# EAGLE board RasPiDV (EAGLE 6.4)
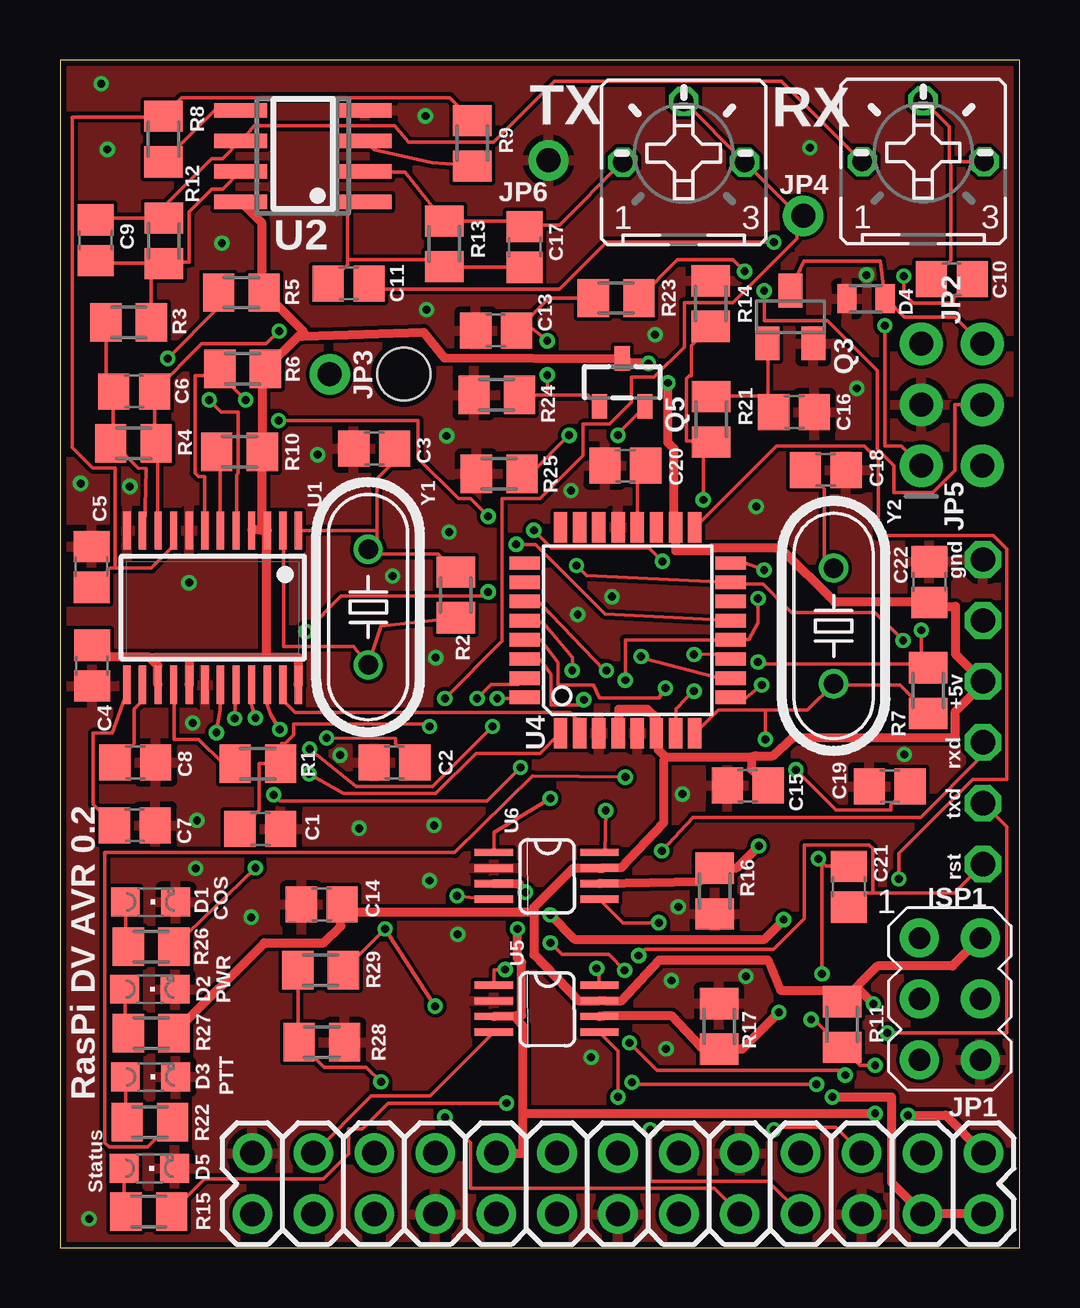
[diagram p0: board, top side]
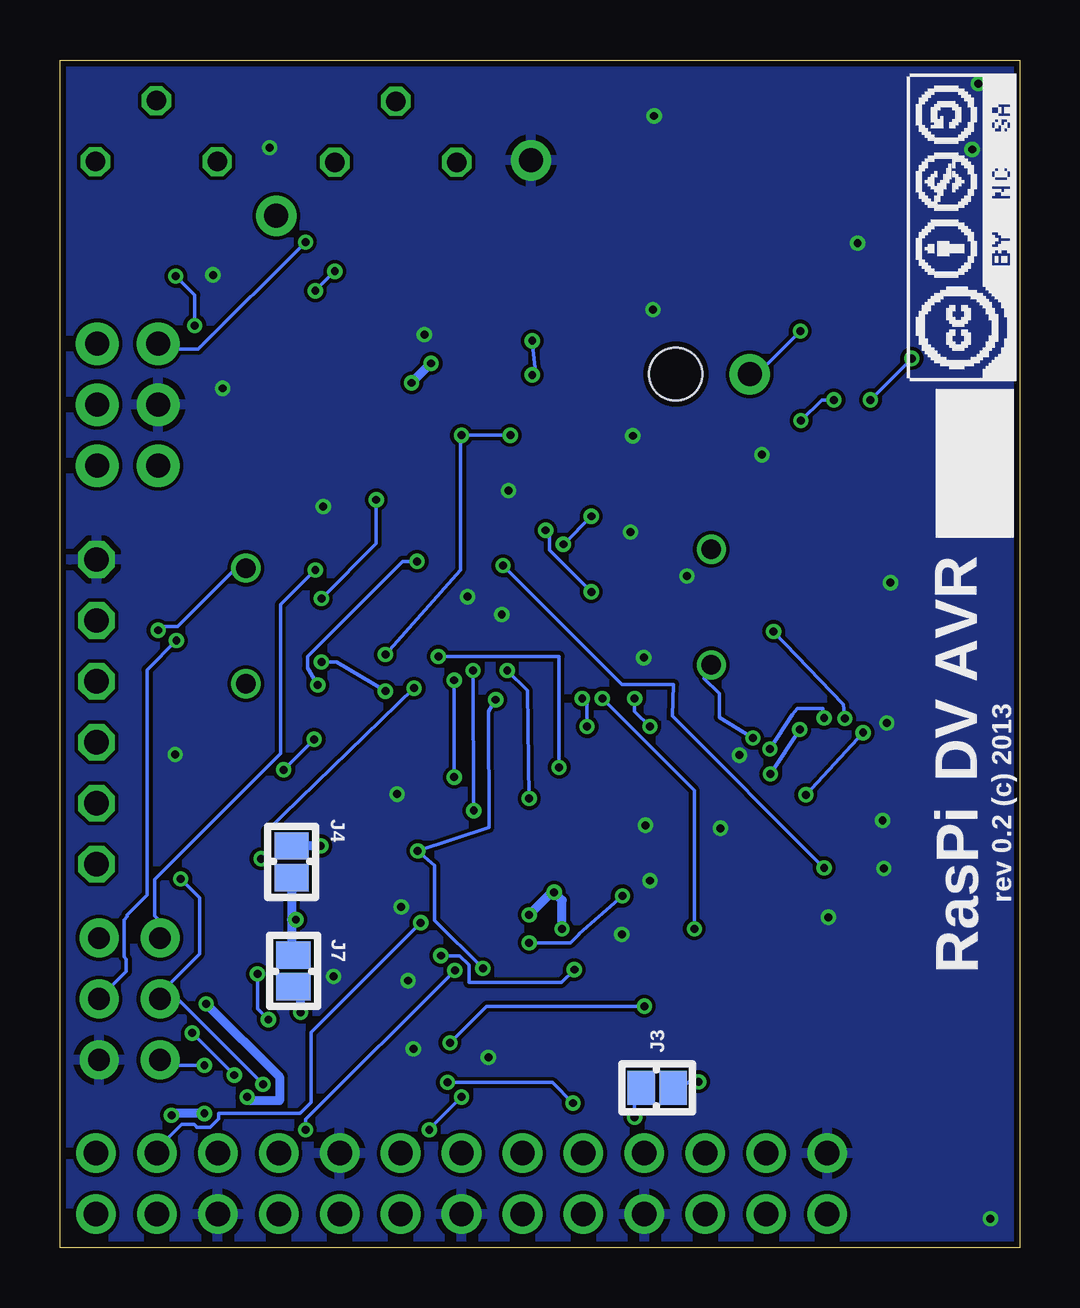
[diagram p1: board, bottom side, seen from below]

Size 40 x 49.5 mm. Coordinates in mm from the lower left corner, seen from the top.
Outline: 0,0 40,0 40,49.5 0,49.5 0,0
Copper layers (1*2*15*16): Top 0.035mm / dielectric 0.2mm / layer 2 0.0175mm / dielectric 1.1mm / layer 15 0.0175mm / dielectric 0.2mm / Bottom 0.035mm
Design rules "SeeedStudio_DRU_no_angle_20130527": minimum track width 6mil, minimum drill 12mil, track to track 6mil, track to pad 6mil, pad to pad 6mil, via to via 6mil, smd to smd 0mil, copper to edge 10mil, drill to drill 10mil, minimum pad ring 6mil, minimum via ring 6mil, stop-mask expansion 2mil, vias tented up to drill 25mil, thermal gap 10mil
Net classes: 1 pwr: width 0.381 mm
Holes 2.2 mm at 14.33,36.41

## Footprints (pad centres in the part's own frame; a part is rotated, then mirrored left to right if it is on the bottom)
C0805 = smd 1.3 x 1.5: 1 -0.85,0; 2 0.85,0
CHIPLED_0805 = smd 1.2 x 1.2: A 0,-1.05; C 0,1.05
MICROMELF-R = smd 0.8 x 1.2: A 0.8,0; C -0.8,0
AVRISP = drill 0.9 pad 1.626: 1 -1.27,2.54; 2 1.27,2.54; 3 -1.27,0; 4 1.27,0; 5 -1.27,-2.54; 6 1.27,-2.54
JUMPER_SOLDER_1X2 = smd 1.143 x 1.422: 1 -0.66,0; 2 0.66,0
2X13 = drill 1.016 pad 1.651: 1 0,0; 2 0,2.54; 3 2.54,0; 4 2.54,2.54; 5 5.08,0; 6 5.08,2.54; 7 7.62,0; 8 7.62,2.54; 9 10.16,0; 10 10.16,2.54; 11 12.7,0; 12 12.7,2.54; 13 15.24,0; 14 15.24,2.54; 15 17.78,0; 16 17.78,2.54; 17 20.32,0; 18 20.32,2.54; 19 22.86,0; 20 22.86,2.54; 21 25.4,0; 22 25.4,2.54; 23 27.94,0; 24 27.94,2.54; 25 30.48,0; 26 30.48,2.54
2X03_ROUND_70MIL = drill 1 pad 1.778: 1 -2.54,1.27; 2 -2.54,-1.27; 3 0,1.27; 4 0,-1.27; 5 2.54,1.27; 6 2.54,-1.27
1X01_ROUND = drill 1 pad 1.676: 1 0,0
1X06-CLEAN = drill 1.016 octagon: 1 -6.35,0; 2 -3.81,0; 3 -1.27,0; 4 1.27,0; 5 3.81,0; 6 6.35,0
SOT23 = smd 1 x 1.4: 1 -0.95,-1.1; 2 0.95,-1.1; 3 0,1.1
SOT23-R = smd 0.635 x 1.016: 1 -0.95,-1; 2 0.95,-1; 3 0,1
M0805 = smd 1.3 x 1.6: 1 -0.95,0; 2 0.95,0
B25P = drill 0.813 octagon: A -2.54,0; E 2.54,0; S 0,2.54
AIS_MK2_CML-MICRO_TSSOP24 = smd 0.305 x 1.6: 1 -3.575,-3.217; 2 -2.925,-3.217; 3 -2.275,-3.217; 4 -1.625,-3.217; 5 -0.975,-3.217; 6 -0.325,-3.217; 7 0.325,-3.217; 8 0.975,-3.217; 9 1.625,-3.217; 10 2.275,-3.217; 11 2.925,-3.217; 12 3.575,-3.217; 13 3.575,3.217; 14 2.925,3.217; 15 2.275,3.217; 16 1.625,3.217; 17 0.975,3.217; 18 0.325,3.217; 19 -0.325,3.217; 20 -0.975,3.217; 21 -1.625,3.217; 22 -2.275,3.218; 23 -2.925,3.217; 24 -3.575,3.217
SOIC-8 = smd 0.6 x 2.2: 1 -1.905,-2.6; 2 -0.635,-2.6; 3 0.635,-2.6; 4 1.905,-2.6; 5 1.905,2.6; 6 0.635,2.6; 7 -0.635,2.6; 8 -1.905,2.6
TQFP32-08 = smd 1.27 x 0.559: 1 -4.293,2.8; 2 -4.293,2; 3 -4.293,1.2; 4 -4.293,0.4; 5 -4.293,-0.4; 6 -4.293,-1.2; 7 -4.293,-2; 8 -4.293,-2.8; 17 4.293,-2.8; 18 4.293,-2; 19 4.293,-1.2; 20 4.293,-0.4; 21 4.293,0.4; 22 4.293,1.2; 23 4.293,2; 24 4.293,2.8 | smd 0.559 x 1.27: 9 -2.8,-4.293; 10 -2,-4.293; 11 -1.2,-4.293; 12 -0.4,-4.293; 13 0.4,-4.293; 14 1.2,-4.293; 15 2,-4.293; 16 2.8,-4.293; 25 2.8,4.293; 26 2,4.293; 27 1.2,4.293; 28 0.4,4.293; 29 -0.4,4.293; 30 -1.2,4.293; 31 -2,4.293; 32 -2.8,4.293
SO08 = smd 0.305 x 1.6: 1 -0.975,-2.2; 2 -0.325,-2.2; 3 0.325,-2.2; 4 0.975,-2.2; 5 0.975,2.2; 6 0.325,2.2; 7 -0.325,2.2; 8 -0.975,2.2
CRYSTAL_HC49/S = drill 0.813: 1 -2.413,0; 2 2.413,0

## Placement (x,y rotation side)
C1  470p  [C0805]  8.35,17.45 0 top
C2  30p  [C0805]  13.94,20.22 0 top
C3  30p  [C0805]  13.1,33.3 0 top
C4  0.1u  [C0805]  1.34,24.26 270 top
C5  1u  [C0805]  1.31,28.37 90 top
C6  22p  [C0805]  3.09,35.69 180 top
C7  27n  [C0805]  3.12,17.6 0 top
C8  27n  [C0805]  3.14,20.22 0 top
C9  470p  [C0805]  1.49,41.99 270 top
C10  0.1u  [C0805]  37.18,40.36 180 top
C11  1u  [C0805]  12.03,40.18 0 top
C13  1u  [C0805]  18.18,38.23 180 top
C14  0.1u  [C0805]  10.91,14.3 180 top
C15  1u  [C0805]  28.67,19.25 180 top
C16  100p  [C0805]  30.6,34.82 0 top
C17  470p  [C0805]  19.37,41.71 270 top
C18  30p  [C0805]  31.92,32.41 180 top
C19  30p  [C0805]  34.59,19.23 0 top
C20  27n  [C0805]  23.56,32.59 0 top
C21  27n  [C0805]  32.89,15.04 90 top
C22  0.1u  [C0805]  36.24,27.74 90 top
D1  Green 0805  [CHIPLED_0805]  3.78,14.4 270 top
D2  Yellow 0805  [CHIPLED_0805]  3.75,10.77 270 top
D3  Red 0805  [CHIPLED_0805]  3.78,7.11 270 top
D4  1N4001  [MICROMELF-R]  33.6,39.55 180 top
D5  Green 0805  [CHIPLED_0805]  3.73,3.3 270 top
ISP1  AVRISP-6  [AVRISP]  37.1,10.36 0 top
J3  JUMPER_SOLDER_1X2  [JUMPER_SOLDER_1X2]  15.11,6.65 0 bottom
J4  JUMPER_SOLDER_1X2  [JUMPER_SOLDER_1X2]  30.35,16.08 270 bottom
J7  JUMPER_SOLDER_1X2  [JUMPER_SOLDER_1X2]  30.27,11.53 90 bottom
JP1  M13X22X13  [2X13]  38.5,3.93 180 top
JP2  RADIO  [2X03_ROUND_70MIL]  37.18,35.13 90 top
JP3  RX_FB  [1X01_ROUND]  11.25,36.4 0 top
JP4  TXOUT  [1X01_ROUND]  30.98,43 0 top
JP5  FTDI connector  [1X06-CLEAN]  38.47,22.33 90 top
JP6  GND  [1X01_ROUND]  20.36,45.31 0 top
Q3  IRLML2060  [SOT23]  30.45,38.79 0 top
Q5  2N7002  [SOT23-R]  23.44,36.07 0 top
R1  100K  [M0805]  8.25,20.17 0 top
R2  1M  [M0805]  16.5,27.2 90 top
R3  100K  [M0805]  2.86,38.56 180 top
R4  100K  [M0805]  3.07,33.53 0 top
R5  47k  [M0805]  7.56,39.8 0 top
R6  47k  [M0805]  7.61,36.63 0 top
R7  1M  [M0805]  36.19,23.22 90 top
R8  47k  [M0805]  4.31,46.2 90 top
R9  47k  [M0805]  17.19,46.02 90 top
R10  47k  [M0805]  7.49,33.17 0 top
R11  2K7  [M0805]  32.61,9.3 270 top
R12  100K  [M0805]  4.34,41.96 90 top
R13  100K  [M0805]  16.02,41.83 90 top
R14  47k  [M0805]  27.12,39.34 90 top
R15  2K7  [M0805]  3.7,1.5 0 top
R16  47k  [M0805]  27.3,14.86 270 top
R17  47k  [M0805]  27.48,9.22 90 top
R21  330  [M0805]  27.15,34.52 270 top
R22  2K7  [M0805]  3.75,5.23 0 top
R23  100  [M0805]  23.18,39.57 0 top
R24  1M  [M0805]  18.2,35.53 180 top
R25  100K  [M0805]  18.31,32.26 180 top
R26  2K7  [M0805]  3.8,12.55 0 top
R27  2K7  [M0805]  3.8,8.94 180 top
R28  3K3  [M0805]  10.91,8.56 0 top
R29  1K5  [M0805]  10.86,11.56 180 top
RX  200K  [B25P]  35.98,45.26 0 top
TX  500K  [B25P]  26,45.24 0 top
U1  CML-MICRO_CMX589AE2  [AIS_MK2_CML-MICRO_TSSOP24]  6.37,26.67 180 top
U2  MCP6002-I/SN  [SOIC-8]  10.13,45.49 90 top
U4  ATMEGA328P  [TQFP32-08]  23.67,25.73 90 top
U5  [SO08]  20.29,9.96 270 top
U6  [SO08]  20.29,15.49 270 top
Y1  4.9152MHz  [CRYSTAL_HC49/S]  12.85,26.7 90 top
Y2  16MHz  [CRYSTAL_HC49/S]  32.25,25.91 90 top

## Library data of the parts
C1-C11 C13-C22 = resistor
D1-D3 D5 ISP1 JP5 Q3 R1-R17 R21-R29 = adafruit
D4 = diode
J3 J4 J7 = dp_devices
JP1 = SparkFun-Connectors
JP2-JP4 JP6 Q5 = microbuilder
RX TX = pot
U1 U5 U6 = mylibrary
U2 = linear-mcp-600x
U4 = SparkFun-DigitalIC; PROD_ID: IC-09069
Y1 Y2 = AIS_Mk2

## Nets
+3V3 [pwr]: J4.2 J7.2 JP1.1 JP1.17 U5.3 U6.3
+5V [pwr]: C4.1 C14.1 C15.1 C22.1 ISP1.2 JP1.2 JP1.4 JP5.4 Q5.3 R5.2 R6.2 R10.2 R11.1 R27.1 U1.3 U1.4 U1.15 U1.17 U1.24 U2.8 U4.4 U4.6 U4.18 U5.7 U6.7
COS: Q5.2 R25.1 U4.11
DTR: JP1.23 U5.4
DTR_5: C21.1 JP5.1 U5.1
GND [pwr]: C1.2 C2.1 C3.1 C4.2 C5.2 C7.2 C8.2 C13.2 C14.2 C15.2 C16.2 C18.1 C19.1 C20.1 C22.2 D1.C D2.C D3.C D4.A D5.C ISP1.6 JP1.6 JP1.9 JP1.14 JP1.20 JP1.25 JP2.3 JP5.6 JP6.1 Q3.2 R14.2 R16.2 R17.2 R24.2 R25.2 R28.2 U1.8 U1.12 U1.18 U2.4 U4.3 U4.5 U4.21 U5.2 U6.2
MISO: ISP1.1 U4.16
MOSI: ISP1.4 R26.2 U4.15
N$1: C13.1 Q5.1 R23.1 R24.1
N$2: D1.A R26.1
N$3: C10.2 RX.E RX.S
N$4: C8.1 U1.14
N$5: C7.1 U1.13
N$6: C6.2 R3.2 R4.1 U1.11
N$7: C9.1 R12.2 RX.A U2.6
N$8: C19.2 R7.1 U4.8 Y2.1
N$9: C2.2 R2.1 U1.2 Y1.1
N$10: C3.2 R2.2 U1.1 Y1.2
N$11: R8.1 U2.5
N$12: R1.1 U1.16
N$13: C18.2 R7.2 U4.7 Y2.2
N$15: C11.1 C17.2 R13.1 U2.1
N$16: D2.A R27.2
N$19: J3.2 R28.1 R29.2
N$20: R9.1 U2.3
N$24: C16.1 Q3.1 R21.1
N$28: C17.1 R13.2 TX.A U2.2
N$31: C20.2 U4.20
N$32: D5.A R15.1
N$33: D3.A R22.1
N$35 [pwr]: J4.1 R16.1 U6.6
N$38 [pwr]: J7.1 R17.1 U5.6
PLLACQ: R6.1 U1.7 U4.13
PTT: R14.1 R21.2 R22.2 U4.12
RADIO_COS: JP2.4 R23.2
RADIO_PTT: D4.C JP2.6 Q3.3
RADIO_RX: C10.1 JP2.1
RADIO_TX: C11.2 JP2.5
RESET: C21.2 ISP1.5 R11.2 U4.29
RX_FB: C6.1 JP3.1 R4.2 U1.10
RX_SN: U1.23 U4.2
RXCLK: U1.21 U4.32
RXD: JP1.8 U5.5
RXD_5: JP5.3 U4.30 U5.8
RXDATA: U1.20 U4.9
RXDCACQ: R10.1 U1.6
RXHOLDN: R5.1 U1.5
RXSIGNAL: C9.2 R3.1 R12.1 U2.7
SCK: ISP1.3 R15.2 U4.17
SCL: JP1.5 U6.4
SCL_5: U4.28 U6.1
SDA: JP1.3 U6.5
SDA_5: U4.27 U6.8
TXCLK: U1.22 U4.1
TXD: J3.1 JP1.10
TXD_5: JP5.2 R29.1 U4.31
TXDATA: U1.19 U4.10
TXOUT: C1.1 JP4.1 R1.2 TX.E TX.S
VBIAS: C5.1 R8.2 R9.2 U1.9

## Tracks (layer width: path | path; a pad name or v marks a point on that pad's centre or on a via)
+3V3  (via drill 0.33)
  Top 0.381: 18.97,9.63 18.1,9.63 U5.3 | 18.97,9.63 19.3,9.22 19.3,5.59 | 19.3,5.59 19.3,3.94 18.2,3.94 JP1.17 | v19.4,14.81 19.14,15.16 18.1,15.16 U6.3 | v19.07,13.28 19.07,12.06 19.25,11.89 19.25,9.68 19.09,9.68 18.97,9.63 | v30.17,13.66 29.35,12.85 21.46,12.85 v20.44,13.87 | v35.35,5.51 36.92,5.51 JP1.1 | 19.3,5.59 v33.98,5.59
  Bottom 0.381: J7.2 30.35,12.27 30.35,13.66 | J4.2 30.35,13.66 | v19.07,13.28 19.07,14.48 v19.4,14.81 19.58,14.73 v20.44,13.87 | v30.17,13.66 30.35,13.66 | v35.35,5.51 35.27,5.59 v33.98,5.59
+5V  (via drill 0.33)
  Top 0.381: 3.85,24.49 4.08,24.26 4.08,23.47 U1.15 | 3.85,24.49 3.73,24.61 1.82,24.61 1.34,25.09 C4.1 | 5.38,24.61 5.38,23.47 U1.17 | 5.38,24.61 3.98,24.61 3.85,24.49 | 5.38,24.61 8.6,24.61 | 8.6,24.61 9.92,24.61 9.92,23.47 U1.24 | 8.43,29.9 U1.3 8.6,29.69 8.6,24.61 | 8.43,29.9 8.07,29.92 U1.4 | 8.43,29.9 8.43,33.17 R10.2 8.43,33.35 8.43,36.5 R6.2 8.58,36.63 9.95,38 10.15,38 | 10.15,38 15.16,38.15 16.02,37.08 23.44,37.06 Q5.3 23.61,36.98 23.74,36.85 v24.53,36.85 | 10.15,38 10.15,38.18 8.53,39.8 R5.2 8.43,39.98 8.43,42.7 U2.8 | JP1.2 35.98,1.4 JP1.4 35.83,1.55 34.66,2.72 34.66,6.27 v32.2,6.27 | ISP1.2 37.2,11.73 34.08,11.73 32.61,10.26 R11.1 | v33.9,10.16 33.34,10.72 33.32,10.72 R11.1 | R27.1 4.77,8.94 8.53,12.7 10.99,12.7 11.7,13.39 11.68,14.3 C14.1 11.86,14.2 12.08,13.97 19.75,13.97 | 19.75,13.97 19.75,14.17 21.38,15.8 22.47,15.8 U6.7 22.6,15.8 22.65,15.82 23.39,15.82 25.16,17.7 25.16,20.27 25.24,20.45 | 19.75,13.97 19.75,12.22 21.61,10.29 22.47,10.29 U5.7 22.73,10.29 23.41,10.29 24.99,11.99 29.51,11.99 30.04,10.72 32.05,10.72 32.43,10.34 R11.1 | U4.4 23.29,21.44 23.29,22.43 24.48,22.43 24.86,22.05 U4.6 24.94,21.26 24.94,20.75 25.24,20.45 | 28.82,20.45 28.82,19.94 29.51,19.25 C15.1 | 25.24,20.45 28.82,20.45 | 28.82,20.45 29,20.5 29.71,20.5 30.55,21.26 37.33,21.26 37.33,22.35 38.4,23.42 JP5.4 37.33,24.74 37.33,26.72 36.34,26.72 C22.1 32.3,26.9 30.04,29.16 27.17,29.16 27.04,29.03 25.67,29.03 U4.18 25.6,30.2 25.6,33.3 25.34,33.55 v25.34,36.04
  Bottom 0.381: v32.2,6.27 32.05,6.12 30.85,6.12 30.85,7.11 v33.9,10.16 | v25.34,36.04 v24.53,36.85
COS  (via drill 0.33)
  Top 0.152: v23.26,33.86 23.26,33.93 24.38,35.05 Q5.2 | v21.23,33.86 19.63,32.26 R25.1 | v26.43,24.71 27.76,24.74 U4.11
  Bottom 0.152: v21.23,33.86 v23.26,33.86 23.31,33.81 23.31,28.25 v26.43,24.71
DTR
  Top 0.152: U5.4 18.08,8.97 15.44,6.33 12.97,6.33 10.59,3.94 JP1.23
DTR_5  (via drill 0.33)
  Top 0.152: 33.88,14.78 37.28,14.78 JP5.1 | 33.88,14.78 33.47,14.78 C21.1 | v18.56,11.58 18.1,11.58 18.1,10.95 U5.1 | v24.12,12.17 24.38,12.42 29.74,12.42 31.03,13.72 31.03,16.79 33.72,16.79 33.88,16.64 33.88,14.78
  Bottom 0.152: v18.56,11.58 19.09,11.05 22.95,11.05 22.95,11.79 23.34,12.17 v24.12,12.17
GND  (via drill 0.33)
  other vias: 15.28,39.09 15.23,47.17 1.21,1.19 7.97,13.77 12.46,17.48 15.59,17.6 15.41,15.29 16.58,13.06 5.66,15.8 5.71,17.81 5.53,21.87 2.91,31.72 10.74,33.05 16.12,33.83 21.3,31.55 24.81,38.05 33.22,35.81 33.62,40.54 25.95,18.9 25.77,14.2 28.59,11.3 35.2,20.55 11.68,20.52 6.75,41.86 1.72,48.51 22.14,7.92 25.27,8.28 31.26,45.85 1.97,45.77 29.03,30.89 0.86,31.85 5.38,27.71 25.49,11.13 21.58,26.39 23.01,27.13 16.22,29.82 15.66,24.59 13.86,27.99
  pour Bottom: 0,49.5 40,49.5 40,0 0,0
  pour Top: 0,49.5 40,49.5 40,0 0,0
MISO  (via drill 0.33)
  Top 0.152: v29.35,28.25 28.57,28.52 U4.16
  Bottom 0.152: v29.35,28.25 30.8,26.8 30.8,20.6 36.06,15.34 36.06,13.82 35.83,13.59 ISP1.1
MOSI  (via drill 0.33)
  Top 0.152: v21.53,28.42 21.94,28.02 27.5,27.74 U4.15 27.98,27.66 29.3,27.66 30.5,26.47 33.98,26.47 v35.15,25.3 | v8.15,15.82 4.77,12.55 R26.2
  Bottom 0.152: v21.53,28.42 16.58,23.47 14.42,23.47 14.47,22.15 v8.15,15.82 | ISP1.4 37.23,11.51 37.23,12.01 37.33,12.12 37.33,13.66 37.2,13.79 37.2,13.87 36.37,14.71 36.37,24.08 v35.15,25.3
N$1  (via drill 0.33)
  Top 0.152: R24.1 20.31,35.53 | 20.31,35.53 22.02,35.53 22.47,35.08 Q5.1 | R23.1 20.39,39.57 19.04,38.23 C13.1 19.42,38.51 v20.31,37.8 | v20.31,36.37 20.31,35.53
  Bottom 0.152: v20.31,36.37 20.19,36.5 v20.31,37.8
N$2
  Top 0.152: R26.1 2.74,12.55 D1.A
N$3
  Top 0.152: 37.13,45.26 37.13,41.15 C10.2 | RX.E 37.13,45.26 | RX.S 37.08,46.71 37.08,45.31 37.13,45.26
N$4
  Top 0.152: C8.1 2.3,20.22 3.09,21.01 3.09,22.45 3.42,22.78 3.42,23.44 U1.14
N$5
  Top 0.152: C7.1 2.25,17.6 1.39,18.47 1.39,21.44 2.18,21.44 2.79,23.11 U1.13
N$6
  Top 0.152: U1.11 3.52,30.05 3.6,32.46 3.27,32.49 2.28,33.48 R4.1 2.23,33.53 2.23,35.69 C6.2 2.18,35.74 1.92,35.74 1.92,38.56 R3.2
N$7
  Top 0.152: C9.1 1.54,42.9 R12.2 3.88,42.95 6.32,45.39 6.78,45.39 7.51,46.13 U2.6 7.59,46.15 8.1,46.76 13.94,46.76 14.52,46.08 18.08,46.08 20.62,48.62 30.07,48.62 33.42,45.26 RX.A
N$8  (via drill 0.33)
  Top 0.152: 29.41,22.4 31.16,22.4 Y2.1 32.3,23.44 35.02,23.44 R7.1 | 29.41,22.4 27.45,22.4 26.48,21.44 U4.8 | v30.68,19.91 32.35,18.24 34.64,18.24 34.64,18.44 35.43,19.23 C19.2 | 29.41,22.4 v29.41,21.18
  Bottom 0.152: v29.41,21.18 v30.68,19.91
N$9  (via drill 0.33)
  Top 0.152: v11.12,21.23 13.99,21.21 13.99,21.01 14.78,20.22 C2.2 | R2.1 16.5,26.24 13.38,25.91 Y1.1 12.24,25.04 9.32,25.04 9.32,29.87 U1.2
  Bottom 0.152: v11.12,21.23 12.52,22.1 12.52,23.09 13.15,23.72 Y1.1
N$10
  Top 0.152: 13.23,29.9 13.23,28.96 Y1.2 13.28,28.91 15.77,28.91 16.5,28.17 R2.2 | 13.23,29.9 13.23,32.05 14.01,32.84 C3.2 | 13.23,29.9 U1.1
N$11
  Top 0.152: U2.5 6.45,47.4 4.31,45.26 R8.1
N$12
  Top 0.152: R1.1 6.8,20.17 5.78,21.18 4.77,21.18 4.77,23.44 U1.16
N$13  (via drill 0.33)
  Top 0.152: Y2.2 31.87,28.32 31.87,31.62 31.08,32.41 C18.2 | v26.43,23.19 26.1,22.91 25.67,22.45 U4.7 | v29.1,24.41 29.18,24.33 36.04,24.33 36.19,24.18 R7.2 35.91,24.38 v35.91,25.73
  Bottom 0.152: v26.43,23.19 28.47,24.41 v29.1,24.41 | Y2.2 32.76,28.32 32.76,28.22 35.1,25.88 35.91,25.88 v35.91,25.73
N$15
  Top 0.152: C17.2 R13.1 15.97,40.92 15.72,41.17 11.98,41.17 | 11.98,41.17 11.98,43.59 U2.1 | 11.98,41.17 11.98,40.97 11.19,40.18 C11.1
N$16
  Top 0.152: R27.2 2.71,8.94 2.71,10.77 D2.A
N$19  (via drill 0.33)
  Top 0.152: v13.38,6.91 12.77,7.52 11.02,7.52 9.98,8.56 R28.1 9.92,8.61 9.92,11.56 R29.2
  Bottom 0.152: J3.2 13.96,6.66 13.96,6.73 13.79,6.91 v13.38,6.91
N$20
  Top 0.152: R9.1 17.19,45.09 15.51,45.21 13.1,45.77 12.74,46.13 U2.3
N$24
  Top 0.152: Q3.1 29.51,37.67 29.51,34.82 C16.1 29.46,35.48 27.15,35.48 R21.1
N$28
  Top 0.152: U2.2 12.74,44.86 13.91,44.83 14.39,44.83 15.97,42.82 R13.2 19.17,42.77 C17.1 19.42,42.62 20.82,42.62 23.44,45.24 TX.A
N$31
  Top 0.152: C20.2 24.07,32.59 U4.20
N$32
  Top 0.152: R15.1 2.69,1.5 D5.A
N$33
  Top 0.152: R22.1 2.74,5.23 D3.A
N$35  (via drill 0.33)
  Top 0.381: v29.13,16.74 28.21,15.82 27.3,15.82 R16.1 27.12,15.72 26.64,15.24 22.55,15.16 22.5,15.19 U6.6
  Bottom 0.381: v29.13,16.74 J4.1
N$38  (via drill 0.33)
  Top 0.381: v29.97,9.8 28.44,8.28 R17.1 26.71,8.36 25.52,9.65 22.65,9.65 U5.6
  Bottom 0.381: J7.1 29.97,10.57 v29.97,9.8
PLLACQ  (via drill 0.33)
  Top 0.152: v19.02,29.31 19.83,29.31 22.73,26.42 27.2,26.19 U4.13 | v17.85,30.48 17.11,31.22 16.61,31.22 14.93,32.89 14.93,34.47 v9.11,34.47 | v7.74,35.33 6.67,36.4 6.67,36.63 R6.1 6.62,36.35 5.63,36.35 5.63,32.28 5.78,32.13 6.04,32.13 U1.7
  Bottom 0.152: v17.85,30.48 v19.02,29.31 | v9.11,34.47 8.25,35.33 v7.74,35.33
PTT  (via drill 0.33)
  Top 0.152: v29.1,27.05 29.1,26.04 28.72,25.35 27.96,25.35 U4.12 27.91,25.32 23.56,25.32 v23.56,23.65 | v26.81,31.17 26.81,33.55 27.15,33.55 R21.2 26.77,33.6 26.1,33.6 26.1,36.22 26.23,36.35 26.33,36.35 26.33,37.59 27.12,38.38 R14.1 | v23.56,19.61 19.7,19.66 16.45,16.46 1.87,16.46 1.87,4.37 2.05,4.19 3.65,4.19 R22.2
  Bottom 0.152: v29.1,27.05 26.81,29.34 v26.81,31.17 | v23.56,23.65 v23.56,19.61
RADIO_COS  (via drill 0.33)
  Top 0.152: v28.54,40.69 28.06,41.17 25.75,41.17 24.15,39.57 R23.2 | v29.35,39.88 29.35,38.63 32,38.63 34.08,36.55 34.08,33.27 34.77,32.59 34.77,31.47 36.39,31.47 37.31,32.38 37.31,35.13 JP2.4
  Bottom 0.152: v29.35,39.88 v28.54,40.69
RADIO_PTT
  Top 0.152: Q3.3 30.45,39.9 31.01,41.12 34.21,41.12 34.38,39.55 D4.C 34.46,39.52 35.2,38.79 37.31,38.79 38.42,37.67 JP2.6
RADIO_RX  (via drill 0.33)
  Top 0.152: v35.17,40.49 35.17,39.78 35.58,39.37 37.23,39.37 37.23,39.57 38.02,40.36 C10.1 | v34.38,38.43 34.38,33.4 35.07,33.4 35.88,32.59 JP2.1
  Bottom 0.152: v35.17,40.49 34.38,39.7 v34.38,38.43
RADIO_TX  (via drill 0.33)
  Top 0.152: v29.76,41.91 22.78,41.91 20.82,39.95 13.12,39.95 12.9,40.18 C11.2
  Bottom 0.152: v29.76,41.91 34.23,37.44 35.88,37.44 35.88,37.67 JP2.5
RESET  (via drill 0.33)
  Top 0.152: v33.98,7.59 33.34,7.59 32.61,8.33 R11.2 32.56,8.38 31.44,9.5 v31.31,9.5 | v25.24,23.32 24.96,22.91 22.5,22.91 22.24,23.44 20.77,23.44 20.77,24.38 20.06,25.32 U4.29 | C21.2 31.92,15.9 v31.62,16.2 31.77,15.95 v31.77,11.4
  Bottom 0.152: v33.98,7.59 35.83,7.59 ISP1.5 | v25.24,23.32 31.39,17.37 31.39,16.43 v31.62,16.2 | v31.31,9.5 31.77,9.96 v31.77,11.4
RX_FB  (via drill 0.33)
  Top 0.152: U1.10 4.08,33.48 4.06,33.48 R4.2 3.96,33.53 3.96,35.69 C6.1 3.98,35.74 5.91,37.67 8.6,37.67 v9.14,38.2
  Bottom 0.152: JP3.1 10.56,36.4 10.56,36.78 v9.14,38.2
RX_SN
  Top 0.152: U4.2 21.66,21.44 21.66,22.02 21.53,22.02 21.25,22.3 9.8,22.3 9.32,22.78 9.32,23.44 U1.23
RXCLK  (via drill 0.33)
  Top 0.152: v18.23,22.89 19.35,22.89 19.37,22.91 U4.32 | v18.03,21.72 15.54,19.23 12.34,19.23 v10.41,20.78 | v8.15,22.07 7.97,22.68 7.97,23.44 U1.21
  Bottom 0.152: v18.23,22.89 18.03,22.68 v18.03,21.72 | v10.41,20.78 9.47,22.23 9.26,22.48 8.2,22.48 v8.15,22.07
RXD  (via drill 0.33)
  Top 0.152: v23.26,6.27 23.26,8.2 22.5,8.97 U5.5 | v24.61,4.9 24.61,2.77 29.51,2.77 JP1.8
  Bottom 0.152: v23.26,6.27 24.61,4.93 v24.61,4.9
RXD_5  (via drill 0.33)
  Top 0.152: v21.84,22.84 21.61,22.61 20.46,22.61 20.46,23.88 20.06,24.49 19.6,24.49 19.37,24.51 U4.30 | v25.09,16.54 26.38,17.93 35.88,17.93 38.47,20.52 JP5.3 | v22.37,11.63 22.47,11.63 22.47,10.95 U5.8
  Bottom 0.152: v21.84,22.84 22.14,22.35 22.12,17.5 v25.09,16.54 24.38,15.93 24.38,13.64 v22.37,11.63
RXDATA  (via drill 0.33)
  Top 0.152: v29.25,23.44 28.62,22.94 U4.9 | v25.11,28.6 24.55,29.16 20.49,29.16 v19.75,29.9 | v17.85,27.33 17.67,27.15 11.73,27.15 v10.25,25.68 | v7.28,22.05 7.31,22.71 7.33,22.81 U1.20
  Bottom 0.152: v29.25,23.44 29.69,24.16 29.69,24.64 25.72,28.6 v25.11,28.6 | v19.75,29.9 19.6,29.74 19.6,29.08 v17.85,27.33 | v10.25,25.68 7.33,22.63 v7.28,22.05
RXDCACQ
  Top 0.152: R10.1 6.67,33.17 6.67,29.9 U1.6
RXHOLDN  (via drill 0.33)
  Top 0.152: v6.22,35.33 6.72,34.82 7.44,34.82 7.44,32.28 7.36,32.21 7.36,29.9 U1.5 | v4.49,37.06 6.6,39.17 6.6,39.8 R5.1
  Bottom 0.152: v4.49,37.06 v6.22,35.33
RXSIGNAL
  Top 0.152: C9.2 1.49,41.12 1.59,41.02 4.34,41.02 R12.1 | R3.1 3.8,40.97 R12.1 | U2.7 7.51,44.86 6.78,44.12 6.32,44.12 5.38,43.18 5.38,41.07 4.39,41.07 R12.1
SCK  (via drill 0.33)
  Top 0.152: v34.97,15.37 34.97,16.43 38.04,19.51 39.47,19.51 39.47,29.11 38.91,29.67 34.1,29.67 34.1,32.82 33.52,33.4 29.86,33.4 26.48,30.02 U4.17 | v18.61,6.02 13.68,6.02 12.62,4.95 12.03,4.95 12.03,3.91 10.99,2.87 6.04,2.87 4.67,1.5 R15.2 | v23.84,6.88 23.92,6.81 v31.54,6.81
  Bottom 0.152: v34.97,15.37 34.18,14.58 34.18,12.24 35.83,10.59 ISP1.3 35.53,10.79 v31.54,6.81 | v18.61,6.02 19.48,6.88 v23.84,6.88
SCL  (via drill 0.33)
  Top 0.152: U6.4 17.8,14.5 v16.55,14.66 | v20.44,12.7 20.92,12.22 22.88,12.22 v23.54,11.56 | v29.76,4.9 29.86,5 32.35,5 JP1.5
  Bottom 0.152: v16.55,14.66 18.36,13.08 18.36,13.06 18.71,12.7 v20.44,12.7 | v23.54,11.56 29.76,5.33 v29.76,4.9
SCL_5  (via drill 0.33)
  Top 0.152: v21.35,24.05 21.35,24.59 20.14,26.06 19.68,26.06 19.37,26.11 U4.28 | v20.44,18.72 18.1,17.3 18.1,16.48 U6.1
  Bottom 0.152: v21.35,24.05 20.52,23.22 v20.44,18.72
SDA  (via drill 0.33)
  Top 0.152: v24.96,13.54 23.46,13.54 22.5,14.5 U6.5
  Bottom 0.152: v24.96,13.54 29.53,8.97 29.53,6.04 29.99,5.59 33.39,5.59 33.39,5.36 33.75,5 34.31,5 34.31,5.03 34.41,5.13 34.92,5.13 35.96,4.09 JP1.3
SDA_5  (via drill 0.33)
  Top 0.152: v22.78,24.05 22.73,24.03 20.03,26.85 19.58,26.85 U4.27 | v22.75,18.21 22.73,16.48 22.5,16.48 U6.8
  Bottom 0.152: v22.75,18.21 v22.78,24.05
TXCLK  (via drill 0.33)
  Top 0.152: v10.38,19.74 11.83,18.92 15.66,18.92 17.34,20.6 20.01,20.6 20.85,21.44 U4.1 | v9.16,21.59 8.78,22.23 8.63,22.63 U1.22
  Bottom 0.152: v9.16,21.59 v10.38,19.74
TXD  (via drill 0.33)
  Top 0.152: v16.05,5.44 17.11,4.37 17.11,2.46 27.27,2.46 JP1.10
  Bottom 0.152: J3.1 16.05,6.38 v16.05,5.44
TXD_5  (via drill 0.33)
  Top 0.152: v17.39,22.89 17.98,23.47 19.12,23.47 U4.31 | R29.1 11.83,11.56 v13.56,13.28 v15.64,10.06 | JP5.2 39.47,17.53 39.47,8.94 v34.49,8.94 | v32.73,7.19 32.53,7.39 24.88,7.39 v23.74,8.53
  Bottom 0.152: v17.39,22.89 13.56,19.05 v13.56,13.28 | v32.73,7.19 v34.49,8.94 | v23.74,8.53 22.22,10.06 v15.64,10.06
TXDATA  (via drill 0.33)
  Top 0.152: v24.23,24.64 24.35,24.56 27.3,23.77 27.96,23.75 U4.10 | v19.2,20.02 17.8,18.62 9.16,18.62 v8.91,18.87 | v6.52,21.46 6.67,22.4 6.67,23.44 U1.19
  Bottom 0.152: v24.23,24.64 19.2,24.64 v19.2,20.02 | v6.52,21.46 v8.91,18.87
TXOUT  (via drill 0.33)
  Top 0.152: C1.1 8.3,18.24 8.3,20.17 R1.2 9.24,20.22 9.24,21.01 9.39,21.01 9.75,21.36 9.75,21.82 15.31,21.82 v15.41,21.72 | TX.S 28.49,45.29 TX.E 30.78,43 JP4.1 30.73,42.95 30.73,42.06 28.06,39.4 26.03,39.4 26.03,37.54 24.76,36.27 23.82,36.27 23.82,35.23 22.9,34.31 21.81,34.31 21.81,33.02 20.01,31.22 18.43,31.22 18.43,25.27 v16.05,22.89
  Bottom 0.152: v15.41,21.72 16.05,22.35 v16.05,22.89
VBIAS
  Top 0.152: 2.3,28.32 3.8,28.32 4.74,29.26 4.74,29.87 U1.9 | 2.3,28.32 2.1,28.32 1.31,27.53 C5.1 | R9.2 17.19,46.99 16.25,47.93 5.07,47.93 4.31,47.17 R8.2 4.26,47.12 0.5,47.12 0.5,33.35 1.37,32.49 2.3,32.49 2.3,28.32

## Text on the board
tNames: gnd | +5v | rxd | txd | COS | rst | PWR | RasPi DV AVR 0.2 | PTT | Status
bNames: DV AVR | RasPi | rev 0.2 (c) 2013